# Altium PCB BEE-1012 PAY-IF V1.0.0.PcbDoc (part 6 of 7)
Units mm, origin at the board's own origin, x right, y up, seen from the top; angles counter-clockwise.
Board outline 93 x 90 mm, 6 copper layers (Top_1, GND_2, SIGNAL_3, PWR_4, GND_5, Bottom_6), stack 1.606 mm thick; 497 components, 371 nets, 2212 pads, 1215 vias.
Unrouted connection lines stored in the file: 56.
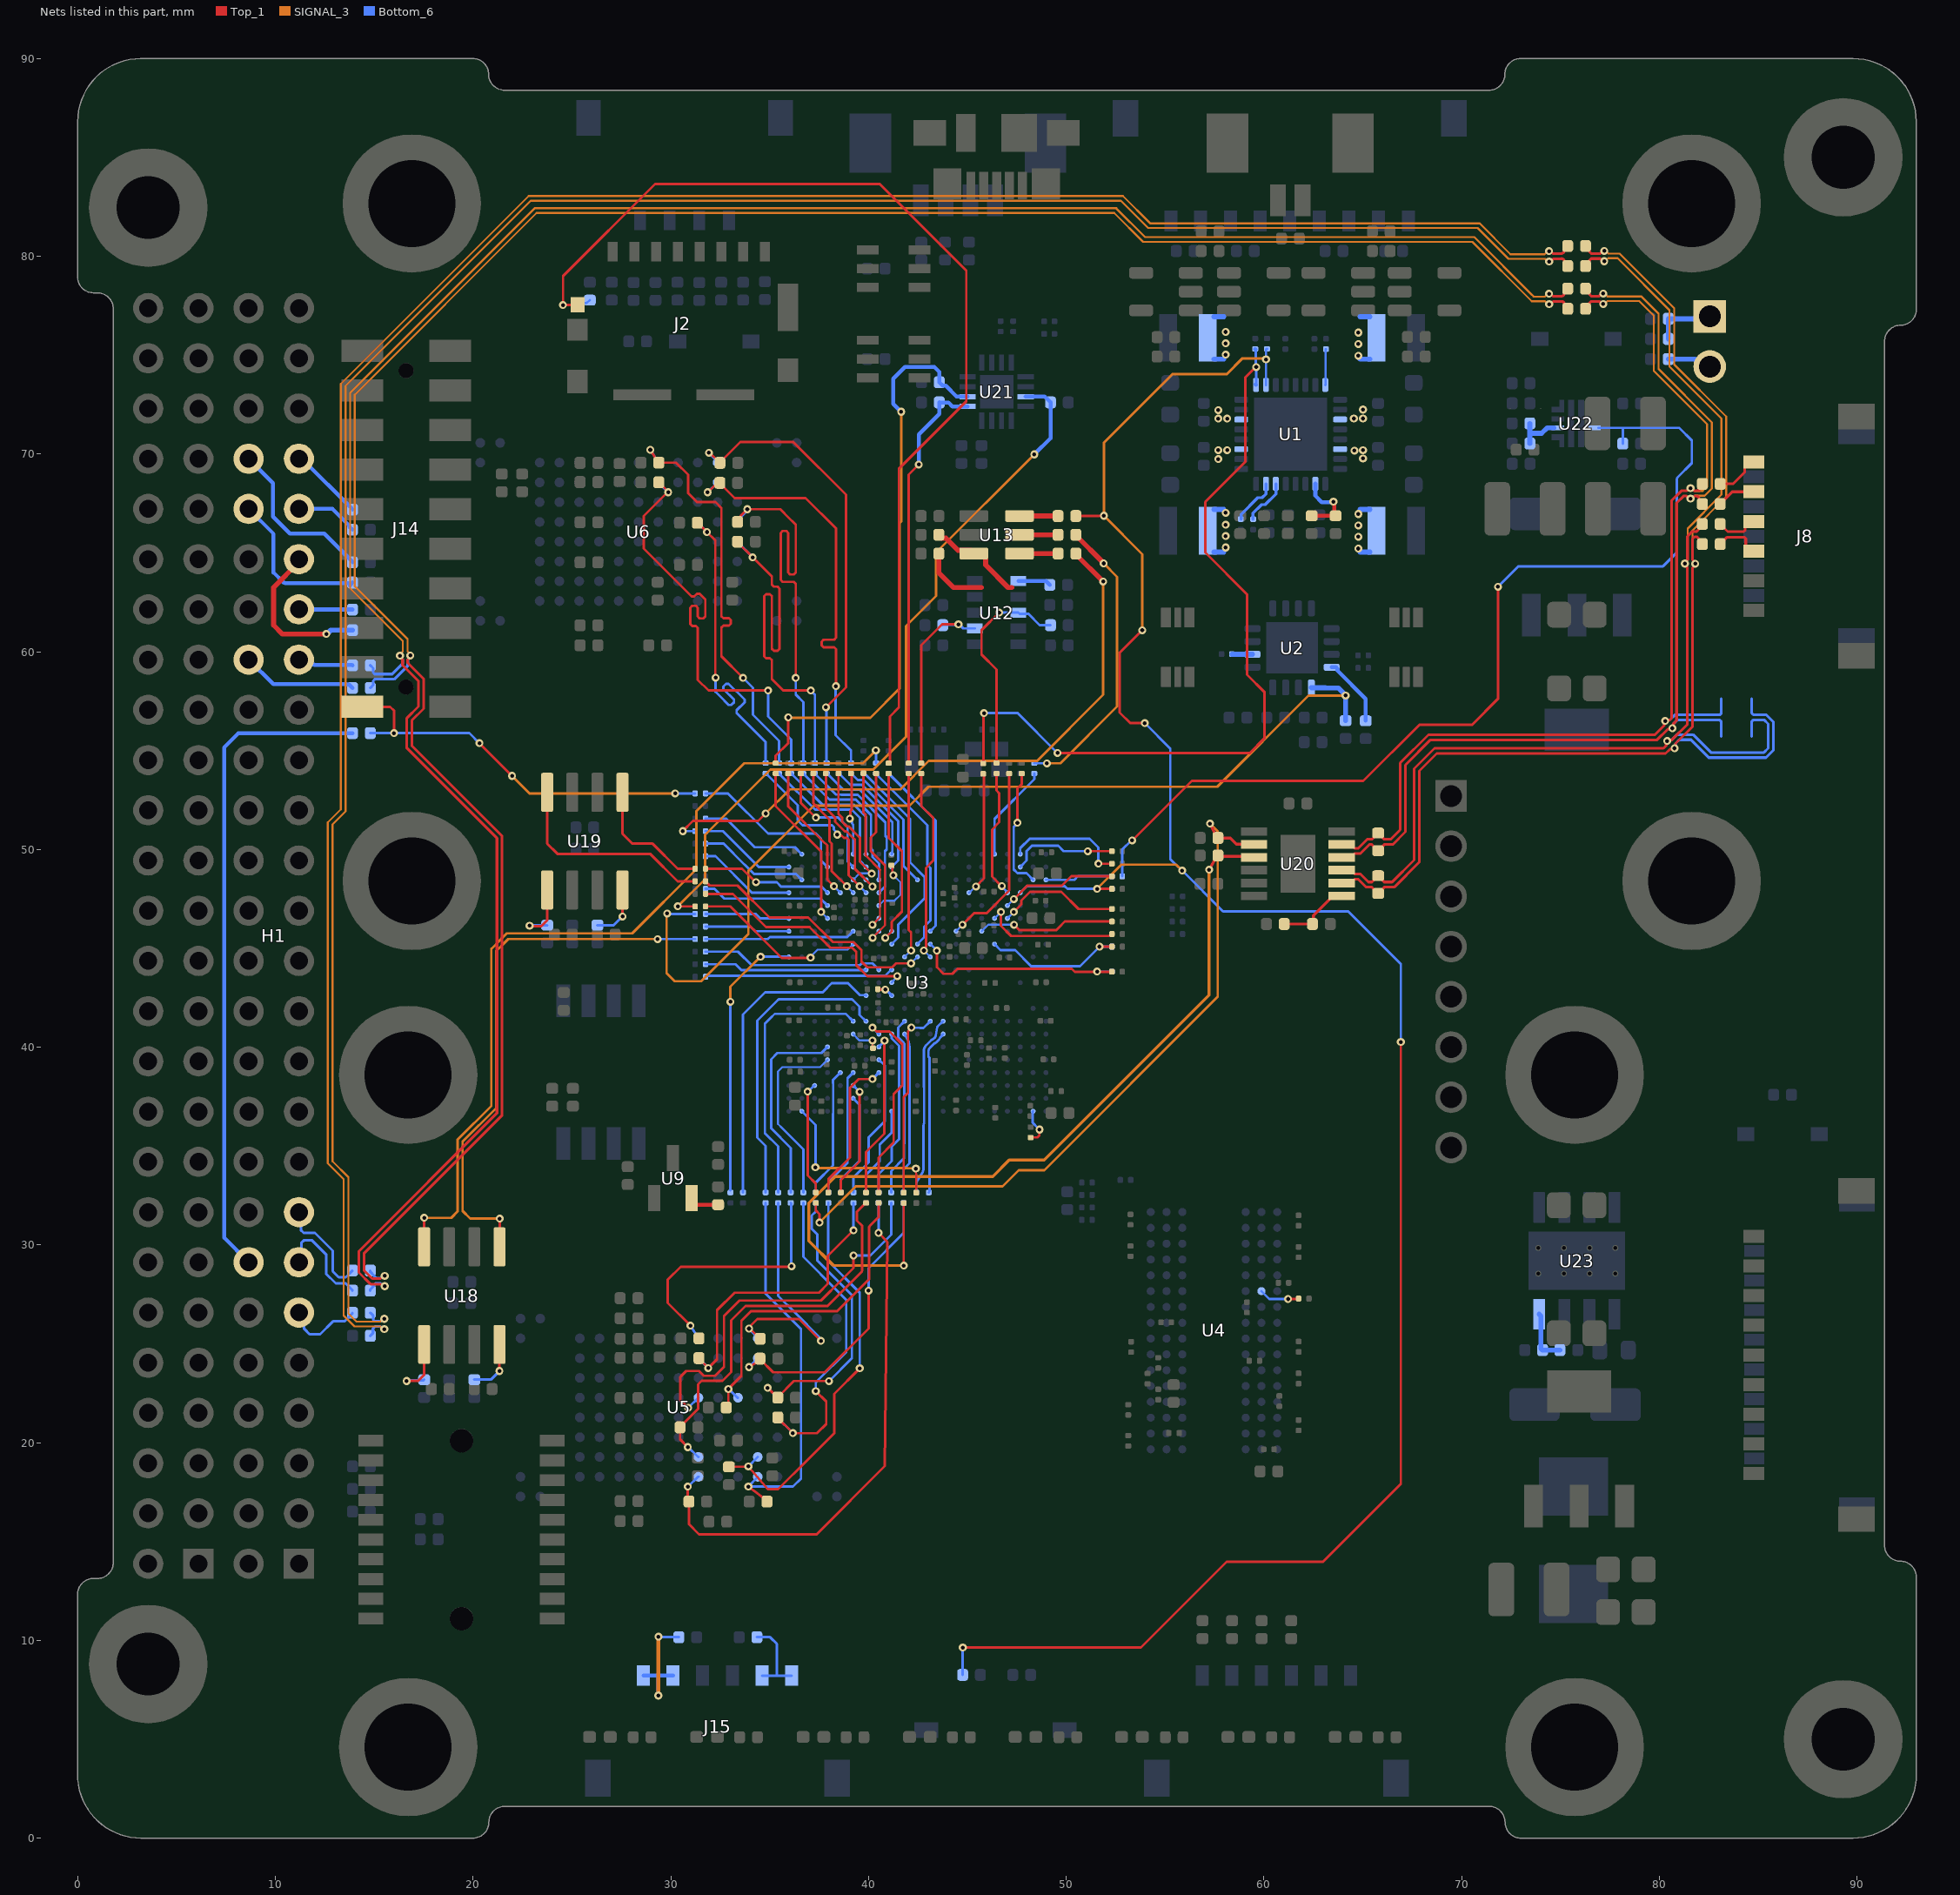
[diagram p9: the nets of this part, all layers, seen from the top]

## Via types
v1: diameter 0.4, hole 0.2, Top_1 to Bottom_6, tented both sides, 1215 vias

## Nets (pads, with @x,y where several pads share a name; then routed paths per layer and width w, separated by ;. In a path a pad name is that pad's centre, name@x,y a point inside that pad or via, vN(x,y) a via of type N, cw(c..) or ccw(c..) an arc to the next point about the centre after c; other vN are vias at no path point) (continued)
NetH1_11: H1.11 R217.2 | length 4
  Bottom_6 w0.134: H1.11@11.19,26.58 11.458,26.313 11.458,25.753 11.733,25.478 12.262,25.478 12.918,26.134 13.495,26.134 13.901,26.54 R217.2@13.901,26.565
NetH1_13: H1.13 R218.2 | length 5.3
  Bottom_6 w0.134: H1.13@11.19,29.12 11.313,29.243 11.313,30.099 11.44,30.226 11.862,30.226 12.566,29.522 12.566,28.54 13.054,28.052 13.555,28.052 13.901,27.706 R218.2@13.901,27.686
NetH1_14: H1.14 R227.1 | length 33.3
  Bottom_6 w0.2: H1.14@8.65,29.12 7.407,30.363 7.407,55.159 8.128,55.88 R227.1@13.901,55.88
NetH1_15: H1.15 R219.2 | length 5.3
  Bottom_6 w0.134: H1.15@11.19,31.66 11.292,31.558 11.292,30.745 11.433,30.604 11.999,30.604 12.9,29.703 12.9,28.664 13.202,28.363 13.564,28.363 13.901,28.7 R219.2@13.901,28.702
NetH1_37: H1.37 R224.2 | length 2.8
  Bottom_6 w0.2: H1.37@11.19,59.6 11.444,59.346 11.963,59.346 11.972,59.336 13.874,59.336 R224.2@13.901,59.309
NetH1_38: H1.38 R225.1 | length 5.8
  Bottom_6 w0.2: H1.38@8.65,59.6 9.896,58.354 13.609,58.354 13.62,58.343 13.729,58.343 13.901,58.171 R225.1@13.901,58.166
NetH1_39: H1.39 R226.2 | length 2.7
  Bottom_6 w0.2: H1.39@11.19,62.14 11.194,62.136 13.897,62.136 R226.2@13.901,62.131
NetH1_41: H1.41 R94.2 | length 8.1
  Top_1 w0.254: H1.41@11.19,64.68 11.19,64.53 9.906,63.246 9.906,61.341 10.35,60.897 v1(12.579,60.897)
  Bottom_6 w0.254: v1(12.579,60.897) 12.618,60.897 12.809,61.087 R94.2@13.901,61.087
NetH1_43: H1.43 R228.2 | length 3.2
  Bottom_6 w0.2: H1.43@11.19,67.22 12.899,67.22 13.759,66.361 13.759,66.309 R228.2@13.901,66.167
NetH1_44: H1.44 R229.1 | length 8.2
  Bottom_6 w0.2: H1.44@8.65,67.22 9.909,65.961 9.909,64.003 10.382,63.531 ccw(c10.522,63.673) 10.496,63.474 13.764,63.474 R229.1@13.901,63.5 R229.1@13.764,63.338
NetH1_45: H1.45 R230.2 | length 3.8
  Bottom_6 w0.2: H1.45@11.19,69.76 11.342,69.76 13.901,67.201 R230.2@13.901,67.183
NetH1_46: H1.46 R231.1 | length 8.4
  Bottom_6 w0.2: H1.46@8.65,69.76 9.878,68.532 9.878,66.83 10.738,65.97 12.472,65.97 13.901,64.541 R231.1@13.901,64.516
NetJ8_3: J8.3 R53.2 | length 2.4
  Top_1 w0.134: R53.2@83.079,65.44 83.433,65.795 84.296,65.795 84.375,65.716 84.375,65.324 84.613,65.087 J8.3@84.783,65.087
NetJ8_4: J8.4 R75.2 | length 2.2
  Top_1 w0.134: R75.2@83.079,66.456 83.465,66.071 84.267,66.071 84.349,66.153 84.349,66.324 84.613,66.587 J8.4@84.783,66.587
NetJ8_5: J8.5 R77.2 | length 2
  Top_1 w0.134: R77.2@83.079,67.474 83.692,68.087 J8.5@84.783,68.087
NetJ8_6: J8.6 R109.2 | length 2.3
  Top_1 w0.134: R109.2@83.079,68.488 83.728,68.488 84.329,69.089 84.329,69.324 84.592,69.587 J8.6@84.783,69.587
NetJ14_19: J14.19 R81.2 R227.2 | length 20.5
  Top_1 w0.125: J14.19@14.393,57.21 15.815,57.21 16.002,57.023 v1(16.002,55.88) ; v1(20.32,55.372) v1(21.971,53.721)
  SIGNAL_3 w0.125: v1(21.971,53.721) 22.86,52.832 v1(30.226,52.832)
  Bottom_6 w0.125: R227.2@14.801,55.88 v1(16.002,55.88) 19.812,55.88 v1(20.32,55.372) ; v1(30.226,52.832) R81.2@31.234,52.832
NetJP3_1: JP3.1 R206.1 R208.1 | length 3.2
  Bottom_6 w0.254: R206.1@80.46,75.819 R208.1@80.46,76.835 82.427,76.835 JP3.1@82.554,76.962
NetJP3_2: JP3.2 R49.1 | length 2.2
  Bottom_6 w0.254: R49.1@80.46,74.794 81.805,74.794 82.176,74.422 JP3.2@82.554,74.422
NetL1_1: L1.1 U1.11 | length 1
  Bottom_6 w0.254: v1@64.873,74.795 L1.1@65.367,74.795 ; 64.873,76.941 L1.1@65.367,76.941
  other v1: 64.551,71.794 65.016,71.794 65.016,72.243 64.781,74.965 64.781,75.565 64.781,76.14
NetL2_1: L2.1 U1.14 | length 1
  Bottom_6 w0.254: v1@64.873,65.045 L2.1@65.367,65.045 ; 64.873,67.191 L2.1@65.367,67.191
  other v1: 64.781,65.215 64.781,65.815 64.781,66.39 64.781,66.965 65.016,69.772 64.58,70.173 65.016,70.196
NetL3_1: L3.1 U1.27 | length 1
  Bottom_6 w0.254: L3.1@57.479,65.045 57.972,65.045 ; L3.1@57.479,67.191 v1@57.972,67.191
  other v1: 58.065,65.272 58.065,65.847 58.065,66.422 58.065,67.022 57.696,69.743 57.696,70.193 58.146,70.193
NetL4_1: L4.1 U1.30 | length 1
  Bottom_6 w0.254: L4.1@57.479,74.795 57.972,74.795 ; L4.1@57.479,76.941 57.972,76.941
  other v1: 57.696,71.79 58.146,71.79 57.696,72.215 58.065,75.022 58.065,75.597 58.065,76.172
NetR1_2: R1.2 U1.22 | length 2.4
  Bottom_6 w0.15: R1.2@59.456,66.7 59.456,67.01 59.883,67.437 60.071,67.437 60.606,67.972 U1.22@60.606,68.493
NetR2_2: R2.2 U1.23 | length 2.4
  Bottom_6 w0.15: R2.2@58.842,66.703 58.848,66.71 58.848,66.95 59.688,67.789 59.915,67.789 60.106,67.98 U1.23@60.106,68.493
NetR3_2: R3.2 U1.8 | length 1.8
  Bottom_6 w0.127: U1.8@63.106,73.493 63.123,73.511 63.123,75.285 R3.2@63.141,75.303
NetR8_1: R8.1 R78.2 U1.1 | length 40.9
  Top_1 w0.127: R78.2@45.803,54.351 45.825,54.373 45.825,56.874 v1(45.847,56.896) ; v1(49.562,54.878) 59.284,54.878 60.039,55.633 60.039,57.944 59.153,58.83 59.153,62.894 57.035,65.012 57.035,67.578 59.055,69.597 59.055,73.867 59.583,74.395 v1(59.612,74.395)
  Bottom_6 w0.127: v1(45.847,56.896) 47.544,56.896 v1(49.562,54.878) ; U1.1@59.584,73.515 59.606,73.536 59.609,73.54 59.609,74.392 v1(59.612,74.395) 59.587,74.419 59.587,75.287 R8.1@59.584,75.29
  Bottom_6 w0.2: R8.1@59.563,75.311 R8.1@59.584,75.29 ; U1.1@59.584,73.515 U1.1@59.606,73.493
NetR9_1: R9.1 U2.16 | length 3.6
  Bottom_6 w0.2: U2.16@63.427,59.217 63.652,59.217 63.727,59.142 63.727,59.042 65.151,57.618 R9.1@65.151,56.505
NetR10_1: R10.1 R74.2 U2.1 | length 50
  SIGNAL_3 w0.125: v1(29.817,46.765) 29.788,46.735 29.788,43.745 30.199,43.334 31.531,43.334 33.924,45.726 33.924,48.91 37.23,52.216 42.081,52.216 43.034,53.169 57.64,53.169 62.257,57.785 v1(64.135,57.785)
  Bottom_6 w0.125: v1(29.817,46.765) 29.846,46.736 R74.2@31.234,46.736
  Bottom_6 w0.25: U2.1@62.402,58.192 62.414,58.179 63.106,58.179 63.119,58.166 63.769,58.166 64.135,57.8 v1(64.135,57.785) R10.1@64.135,56.515
NetR11_1: R11.1 U2.6 | length 1
  Bottom_6 w0.254: R11.1@58.393,59.867 U2.6@59.427,59.867
NetR12_1: R12.1 R13.2 U1.18 | length 3.6
  Top_1 w0.2: R13.2@62.42,66.871 62.583,66.871 63.464,66.871 R12.1@63.627,66.871 63.608,67.008 63.592,67.008 63.557,67.043 63.557,67.547 v1(63.519,67.585)
  Bottom_6 w0.2: U1.18@62.606,68.493 62.606,67.881 62.925,67.562 63.495,67.562 v1(63.519,67.585)
NetR21_1: R21.1 R22.2 U3.H10 | length 11.2
  Top_1 w0.125: v1(43.463,44.878) 43.463,44.042 43.797,43.708 44.247,43.708 44.504,43.965 49.628,43.965 50.289,43.965 50.439,43.815 51.562,43.815 R22.2@52.316,43.815
  Bottom_6 w0.125: U3.H10@43.128,45.212 v1(43.463,44.878) ; v1(51.562,43.824) 51.567,43.82 52.311,43.82 R21.1@52.316,43.815
NetR67_2: R67.2 R169.2 | length 32.5
  Top_1 w0.125: v1(30.607,50.927) 31.119,51.439 34.421,51.439 v1(34.798,51.816)
  Top_1 w0.254: R169.2@50.488,64.963 50.488,64.932 51.871,63.549 v1(51.871,63.547)
  SIGNAL_3 w0.125: v1(34.798,51.816) 36.022,53.04 41.61,53.04 43.053,54.483 48.538,54.483 51.871,57.816 v1(51.871,63.547)
  Bottom_6 w0.125: v1(30.607,50.927) R67.2@31.234,50.927
NetR87_2: R87.2 U18.1 | length 27.6
  Top_1 w0.125: U18.1@21.336,29.902 21.347,29.913 v1(21.347,31.33)
  SIGNAL_3 w0.125: v1(21.347,31.33) 19.858,31.33 19.471,31.716 19.471,35.221 21.177,36.926 21.177,44.86 21.783,45.466 v1(29.337,45.466)
  Bottom_6 w0.125: v1(29.337,45.466) R87.2@31.234,45.466
NetR88_2: R88.2 R207.1 U22.9 | length 50.7
  Top_1 w0.127: v1(53.339,50.455) 56.35,53.467 65.03,53.467 67.873,56.31 70.534,56.31 71.838,57.614 v1(71.838,63.281)
  Bottom_6 w0.127: R88.2@52.84,48.641 52.84,49.997 53.299,50.455 v1(53.339,50.455) ; v1(71.838,63.281) 72.865,64.308 80.132,64.308 ccw(c80.132,64.435) 80.221,64.344 80.859,64.982 ccw(c80.768,65.071) 80.895,65.071 80.895,68.735 cw(c81.022,68.735) 80.933,68.825 81.646,69.538 81.646,70.683 81.021,71.307 ; U22.9@76.917,71.32 78.171,71.32 ; R207.1@78.154,70.521 78.154,71.304 78.171,71.32 ; 81.008,71.32 78.171,71.32
NetR89_2: R89.2 U18.4 | length 43.3
  Top_1 w0.125: U18.4@17.526,29.902 v1(17.526,31.369)
  SIGNAL_3 w0.125: v1(17.526,31.369) 18.896,31.369 19.221,31.694 19.221,35.324 20.927,37.03 20.927,44.971 21.711,45.755 28.051,45.755 31.3,49.004 31.3,51.939 33.72,54.359 39.718,54.359 v1(40.373,55.013)
  Bottom_6 w0.125: v1(40.373,55.013) 40.386,55 R89.2@40.386,54.364
NetR91_2: R91.2 U19.1 | length 6.5
  Top_1 w0.134: U19.1@27.559,52.889 27.559,50.8 28.067,50.292 29.083,50.292 30.353,49.022 R91.2@31.234,49.022
NetR93_2: R93.2 U19.4 | length 10.9
  Top_1 w0.134: U19.4@23.749,52.889 23.749,50.292 24.264,49.777 28.957,49.777 30.347,48.387 R93.2@31.234,48.387
NetR96_2: R96.2 R164.2 U12.3 | length 11.2
  Top_1 w0.127: R96.2@46.482,54.364 46.482,59.093 45.72,59.855 45.72,61.087 v1(46.609,61.976)
  Bottom_6 w0.125: v1(46.609,61.976) U12.3@47.582,61.976 47.65,61.908 48.096,61.908 48.663,61.341 R164.2@49.207,61.341
NetR98_2: R98.2 R197.1 U21.15 | length 38.6
  Top_1 w0.125: v1(30.353,47.124) 30.36,47.117 R98.2@31.234,47.117
  SIGNAL_3 w0.125: v1(30.353,47.124) 30.36,47.124 31.73,48.494 31.73,50.735 35.034,54.038 40.243,54.038 41.901,55.696 41.901,61.294 43.42,62.813 43.42,65.01 v1(48.387,69.977)
  Bottom_6 w0.2: U21.15@47.952,72.902 48.914,72.902 49.03,72.785 49.035,72.785 49.207,72.613 R197.1@49.207,72.608 49.207,70.797 v1(48.387,69.977)
NetR99_2: R99.2 R198.2 U21.6 | length 29.6
  Top_1 w0.125: R99.2@35.306,54.364 35.306,54.737 35.941,55.372 v1(35.941,56.68)
  SIGNAL_3 w0.125: v1(35.941,56.68) 35.966,56.655 40.091,56.655 41.586,58.15 41.586,66.509 41.656,66.579 v1(41.656,72.136)
  Bottom_6 w0.2: v1(41.656,72.136) 41.255,72.537 41.255,73.803 41.848,74.397 43.332,74.397 43.582,74.147 R198.2@43.582,73.625 43.582,73.62 43.754,73.448 43.914,73.448 44.454,72.908 45.006,72.908 U21.6@45.012,72.902
NetR100_2: R100.2 R199.2 U21.5 | length 20.4
  Top_1 w0.125: R100.2@42.037,54.364 42.037,68.961 v1(42.545,69.469)
  Bottom_6 w0.2: v1(42.545,69.469) 42.545,70.993 43.582,72.03 R199.2@43.582,72.609 43.586,72.605 44.04,72.605 44.243,72.402 U21.5@45.012,72.402
NetR125_2: R125.2 R165.2 U12.7 | length 10
  Top_1 w0.125: R125.2@42.672,54.364 42.672,60.325 43.731,61.384 v1(44.552,61.384)
  Bottom_6 w0.125: R165.2@43.757,61.341 43.779,61.363 44.53,61.363 v1(44.552,61.384) 44.586,61.384 44.794,61.176 U12.7@45.382,61.176
NetR126_2: R126.2 R168.2 | length 14.9
  Top_1 w0.254: R168.2@50.488,65.913 50.488,65.892 51.898,64.482 v1(51.898,64.467)
  SIGNAL_3 w0.125: v1(49.025,54.353) 49.029,54.356 49.706,54.356 52.578,57.228 52.578,63.787 v1(51.898,64.467)
  Bottom_6 w0.125: R126.2@48.387,54.364 48.393,54.359 49.019,54.359 v1(49.025,54.353)
NetR128_1: R128.1 U3.AA2 | length 1.8
  Top_1 w0.125: R128.1@48.228,35.437 48.541,35.437 48.646,35.542 48.646,35.828 v1(48.651,35.833)
  Bottom_6 w0.125: U3.AA2@48.328,36.762 48.304,36.738 48.304,36.65 48.301,36.646 48.301,36.183 48.572,35.912 v1(48.651,35.833)
NetR131_2: R131.2 U4.L8 | length 2.1
  Top_1 w0.125: v1(61.226,27.262) 61.687,27.262 R131.2@61.756,27.283
  Bottom_6 w0.125: U4.L8@59.878,27.662 60.278,27.262 v1(61.226,27.262) v1@61.278,27.262
NetR161_1: R161.1 U9.2 | length 1.5
  Top_1 w0.2: U9.2@31.059,32.36 31.059,32.241 31.264,32.036 R161.1@32.395,32.036
NetR166_2: R166.2 U12.1 | length 1.7
  Bottom_6 w0.2: U12.1@47.582,63.576 48.976,63.576 49.168,63.383 R166.2@49.168,63.379
NetR167_1: R167.1 U13.6 | length 2
  Top_1 w0.254: U13.6@47.637,66.863 R167.1@49.588,66.863
NetR168_1: R168.1 U13.5 | length 2
  Top_1 w0.254: U13.5@47.637,65.913 R168.1@49.588,65.913
NetR169_1: R169.1 U13.4 | length 2
  Top_1 w0.254: U13.4@47.637,64.963 R169.1@49.588,64.963
NetR170_1: R170.1 SB1.1 | length 3.4
  Top_1 w0.254: R170.1@43.561,64.958 43.561,63.989 44.304,63.246 SB1.1@45.707,63.246
NetR171_1: R171.1 SB1.2 U13.3 | length 5
  Top_1 w0.254: R171.1@43.561,65.913 43.561,65.894 43.708,65.746 43.919,65.746 44.534,65.131 45.159,65.131 U13.3@45.327,64.963 45.757,64.963 45.925,64.795 45.925,64.387 47.066,63.246 SB1.2@47.244,63.246
NetR179_2: R179.2 U18.5 | length 3.5
  Top_1 w0.134: v1(16.637,23.114) 16.651,23.128 17.233,23.128 17.526,23.422 U18.5@17.526,24.962
  Bottom_6 w0.134: v1(16.637,23.114) 16.672,23.149 17.491,23.149 R179.2@17.526,23.183
NetR181_1: R181.1 U18.8 | length 2.8
  Top_1 w0.134: v1(21.336,23.622) U18.8@21.336,24.962
  Bottom_6 w0.134: R181.1@20.066,23.183 20.897,23.183 v1(21.336,23.622)
NetR185_2: R185.2 U19.5 | length 3.5
  Top_1 w0.134: v1(22.86,46.143) 22.887,46.115 23.456,46.115 23.749,46.409 U19.5@23.749,47.949
  Bottom_6 w0.134: v1(22.86,46.143) 22.874,46.156 23.735,46.156 R185.2@23.749,46.17
NetR187_1: R187.1 U19.8 | length 2.8
  Top_1 w0.134: v1(27.559,46.609) U19.8@27.559,47.949
  Bottom_6 w0.134: R187.1@26.289,46.17 27.12,46.17 v1(27.559,46.609)
NetR191_1: R191.1 R193.1 U20.7 | length 3.7
  Top_1 w0.15: R193.1@61.029,46.228 R191.1@62.459,46.228 62.502,46.271 62.502,46.665 63.487,47.65 U20.7@63.938,47.65
NetR203_2: R203.2 R204.1 U22.2 | length 2.4
  Bottom_6 w0.254: R203.2@73.454,70.53 73.454,71.045 ; R204.1@73.454,71.545 73.454,71.045 ; U22.2@74.674,71.323 74.596,71.323 74.594,71.326 74.326,71.326 74.045,71.045 73.454,71.045
NetR210_2: R210.2 R211.1 U23.4 | length 2.8
  Bottom_6 w0.254: U23.4@73.924,26.495 74.01,26.41 74.01,24.767 R210.2@74.095,24.681 R211.1@74.973,24.681
NRST: C29.1 R7.1 R18.2 R167.2 R188.2 U1.2 U3.D3 | length 114.7
  Top_1 w0.127: v1(44.773,9.636) 53.786,9.636 58.12,13.97 62.992,13.97 66.929,17.907 v1(66.929,40.259) ; R167.2@50.488,66.863 50.494,66.869 51.901,66.869 v1(51.907,66.876) ; v1(51.562,48.006) C29.1@52.316,48.006 ; v1(53.848,61.087) 52.705,59.944 52.705,56.925 53.242,56.388 v1(53.975,56.388)
  SIGNAL_3 w0.125: v1(51.562,48.006) 52.788,49.232 55.564,49.232 v1(55.867,48.929)
  SIGNAL_3 w0.127: v1(53.848,61.087) 53.848,64.935 v1(51.907,66.876) 51.907,70.576 55.362,74.031 58.11,74.031 58.917,74.838 59.756,74.838 59.759,74.835 60.057,74.835 v1(60.11,74.782)
  Bottom_6 w0.127: R188.2@44.762,8.255 44.767,8.26 44.767,9.631 v1(44.773,9.636) ; U3.D3@47.678,47.812 48,48.134 49.936,48.134 50.064,48.006 v1(51.562,48.006) R18.2@52.316,48.006 ; v1(53.975,56.388) 55.265,55.098 55.265,49.51 55.846,48.929 v1(55.867,48.929) 57.933,46.863 64.266,46.863 66.929,44.2 v1(66.929,40.259) ; U1.2@60.106,73.493 60.11,73.497 v1(60.11,74.782) 60.11,75.279 60.147,75.317 R7.1@60.16,75.317
NRST_OUT: R19.2 U3.E4 | length 5.9
  Top_1 w0.125: v1(47.353,47.487) 48.031,48.165 49.781,48.165 50.257,48.641 R19.2@52.316,48.641
  Bottom_6 w0.1: U3.E4@47.028,47.162 v1(47.353,47.487)
PA0: R31.1 U3.U18 | length 9.4
  Bottom_6 w0.1: 35.629,35.912 35.418,36.123 35.418,38.765 35.642,38.988 37.554,38.988 U3.U18@37.928,39.362
  Bottom_6 w0.125: 35.629,35.912 36.703,34.838 R31.1@36.703,32.647
PA1: R32.1 U3.V17 | length 6.6
  Bottom_6 w0.125: R32.1@37.338,32.647 37.338,33.147 38.209,34.018 38.209,35.912 38.209,36.635 38.216,36.642 38.216,37.531 38.214,37.534 38.214,37.857 38.216,37.859 38.216,38.182 38.209,38.189 38.209,38.343 U3.V17@38.578,38.712
PA2: R34.1 U3.R14 | length 10.3
  Top_1 w0.125: v1(40.203,40.987) 40.218,40.987 40.412,40.794 41.066,40.794 41.716,40.144 41.716,38.061 41.275,37.619 41.275,35.912 41.275,35.177 40.513,34.415 40.513,32.785 R34.1@40.513,32.647
  Bottom_6 w0.125: v1(40.203,40.987) U3.R14@40.528,40.662
PA3: R35.1 U3.T18 | length 10.3
  Bottom_6 w0.125: R35.1@36.068,32.647 36.068,34.904 35.075,35.897 35.075,39.391 35.391,39.707 37.623,39.707 U3.T18@37.928,40.012
PA4: R37.1 U3.P16 | length 13.6
  Bottom_6 w0.1: 35.128,41.552 35.26,41.683 38.857,41.683 38.87,41.67
  Bottom_6 w0.125: 35.128,41.552 34.761,41.185 34.761,35.653 35.433,34.981 R37.1@35.433,32.647 ; 38.87,41.67 U3.P16@39.228,41.312
PA5: R38.1 U3.V16 | length 6.6
  Bottom_6 w0.125: R38.1@37.973,32.647 37.973,33.184 38.944,34.155 38.944,35.912 38.944,36.638 38.939,36.642 38.939,37.531 38.942,37.534 38.942,37.857 38.939,37.859 38.939,38.182 38.944,38.186 38.944,38.428 U3.V16@39.228,38.712
PA6: R39.1 U3.T14 | length 8.5
  Top_1 w0.125: R39.1@39.878,32.647 39.878,34.701 40.802,35.625 40.802,35.912 40.802,40.321 v1(40.813,40.333)
  Bottom_6 w0.125: U3.T14@40.528,40.012 40.528,40.03 40.813,40.315 v1(40.813,40.333)
PA7: R41.1 U3.P15 | length 15.5
  Bottom_6 w0.125: R41.1@34.798,32.647 34.798,35.014 34.38,35.433 34.38,41.345 35.328,42.294 35.418,42.384 cw(c35.507,42.296) 35.507,42.421 39.126,42.421 cw(c39.126,42.296) 39.214,42.384 39.553,42.045 39.553,41.637 U3.P15@39.878,41.312
PA8: R44.1 U3.R13 | length 8.6
  Bottom_6 w0.125: R44.1@40.513,32.647 40.513,33.579 41.175,34.241 41.175,34.97 41.551,35.346 41.551,35.912 41.551,40.064 41.178,40.437 U3.R13@41.178,40.662
PA9: R46.1 U3.U14 | length 7.5
  Bottom_6 w0.125: R46.1@39.243,32.647 39.243,33.413 40.005,34.175 40.005,35.438 40.479,35.912 40.818,36.25 40.818,39.072 U3.U14@40.528,39.362
PA10: R48.1 U3.R12 | length 8.2
  Bottom_6 w0.125: R48.1@41.783,32.647 41.783,33.823 42.08,34.12 42.08,35.912 42.08,39.989 42.079,39.997 42.042,40.275 U3.R12@41.828,40.662
PA11: R50.1 U3.P12 | length 9.2
  Bottom_6 w0.125: R50.1@41.148,32.647 41.148,33.733 41.803,34.388 41.816,35.808 41.816,40.181 41.779,40.218 41.503,40.494 41.503,40.987 U3.P12@41.828,41.312
PA14: R55.1 U3.V14 | length 7.5
  Top_1 w0.125: R55.1@37.973,32.647 37.973,33.325 39.065,34.417 39.065,37.944 39.508,38.387 v1(40.203,38.387)
  Bottom_6 w0.125: v1(40.203,38.387) U3.V14@40.528,38.712
PA17: R56.1 U3.R9 | length 8.3
  Bottom_6 w0.125: R56.1@43.053,32.647 43.083,32.716 43.083,35.912 43.083,39.466 43.032,39.517 43.032,39.818 43.083,39.938 43.12,39.975 43.321,40.176 cw(c43.409,40.087) 43.351,40.198 43.366,40.206 ccw(c43.128,40.662) 43.546,40.362 43.645,40.5 cw(c43.746,40.427) 43.65,40.506 U3.R9@43.778,40.662
PA18: R58.1 U3.W16 | length 5.9
  Top_1 w0.125: R58.1@38.608,32.647 38.608,33.265 39.553,34.21 v1(39.553,37.737)
  Bottom_6 w0.125: U3.W16@39.228,38.062 v1(39.553,37.737)
PA21: R59.1 U3.W19 | length 5.8
  Top_1 w0.125: v1(36.923,37.755) 36.927,37.75 36.927,33.518 37.338,33.107 R59.1@37.338,32.647
  Bottom_6 w0.125: v1(36.923,37.755) 36.947,37.755 37.254,38.062 U3.W19@37.278,38.062
PA22: R61.1 U3.P10 | length 9.6
  Top_1 w0.125: R61.1@41.783,32.639 41.783,37.465 42.004,37.686 42.004,40.786 v1(42.17,40.992)
  Bottom_6 w0.125: v1(42.17,40.992) 42.614,40.972 ccw(c42.62,41.097) 42.62,40.972 42.788,40.972 U3.P10@43.128,41.312
PA23: R63.1 U3.AA20 | length 9.4
  Top_1 w0.125: v1(42.395,33.856) 42.42,33.413 cw(c42.295,33.406) 42.42,33.406 42.42,32.641 R63.1@42.418,32.639
  SIGNAL_3 w0.125: v1(37.315,33.924) 37.349,33.89 41.945,33.89 cw(c41.945,33.765) 41.954,33.89 v1(42.395,33.856)
  Bottom_6 w0.125: U3.AA20@36.628,36.762 37.32,36.07 37.32,35.912 37.32,33.929 v1(37.315,33.924)
PA24: R65.1 U3.P9 | length 9.1
  Bottom_6 w0.125: R65.1@42.418,32.647 42.418,33.137 cw(c42.543,33.137) 42.438,33.204 42.721,33.646 ccw(c42.395,33.856) 42.782,33.856 42.782,35.912 42.784,36.018 42.814,36.196 42.814,36.462 42.806,39.423 42.806,39.838 cw(c43.157,39.835) 42.908,40.083 43.162,40.337 cw(c43.41,40.088) 43.256,40.403 ccw(c43.128,40.662) 43.412,40.613 43.478,40.988 cw(c43.601,40.967) 43.512,41.055 U3.P9@43.769,41.312
PA25: R67.1 U3.B21 | length 5
  Bottom_6 w0.125: R67.1@31.758,50.927 32.638,50.927 34.455,49.11 35.328,49.11 U3.B21@35.976,49.11
PA26: R69.1 U3.K14 | length 9.2
  Bottom_6 w0.125: R69.1@31.758,44.831 33.401,44.831 34.086,44.146 39.562,44.146 39.653,44.237 40.203,44.237 U3.K14@40.528,43.912
PA28: R72.1 U3.L13 | length 12.2
  Top_1 w0.125: R72.1@31.758,47.752 33.14,47.752 34.819,46.073 37.025,46.073 38.07,45.027 39.174,45.027 39.385,44.816 39.385,44.149 39.944,43.59 v1(41.456,43.59)
  Bottom_6 w0.1: U3.L13@41.178,43.262 v1(41.456,43.59)
PA29: R92.1 U3.D21 | length 5
  Bottom_6 w0.125: R92.1@31.758,49.657 32.258,49.657 34.103,47.812 U3.D21@35.978,47.812
PA30: R73.1 U3.K15 | length 8.3
  Bottom_6 w0.125: R73.1@31.758,44.196 33.274,44.196 33.575,43.895 39.861,43.895 U3.K15@39.878,43.912
PA31: R74.1 U3.F21 | length 4.3
  Bottom_6 w0.125: R74.1@31.758,46.736 34.304,46.736 34.528,46.512 U3.F21@35.978,46.512
PB1: R33.1 U3.G21 | length 4.3
  Bottom_6 w0.125: R33.1@31.758,46.101 34.031,46.101 34.27,45.862 U3.G21@35.978,45.862
PB3: R113.1 U3.J21 | length 13.9
  SIGNAL_3 w0.125: v1(33.02,42.291) 33.02,43.053 v1(34.544,44.577)
  Bottom_6 w0.125: R113.1@33.02,32.766 v1(33.02,42.291) ; v1(34.544,44.577) 35.328,44.577 35.963,44.577 U3.J21@35.978,44.562
PB6: R40.1 U3.K13 | length 9.6
  Bottom_6 w0.125: R40.1@31.758,43.561 31.805,43.608 35.328,43.608 40.85,43.608 41.154,43.912 U3.K13@41.178,43.912
PB7: R42.1 U3.C20 | length 5.6
  Bottom_6 w0.125: R42.1@31.758,50.292 32.673,50.292 33.158,49.807 33.216,49.749 34.213,48.752 35.328,48.752 36.338,48.752 U3.C20@36.628,48.462
PB15: R111.1 U3.M15 | length 16.1
  Bottom_6 w0.125: R111.1@33.655,32.647 33.655,41.656 34.78,42.781 37.686,42.781 38.147,43.242 38.962,43.242 39.574,42.631 39.859,42.631 U3.M15@39.878,42.612
PB21: R60.1 U3.D15 | length 9.2
  Top_1 w0.127: v1(38.417,50.751) 38.469,50.699 38.649,50.699 38.757,50.591 38.899,50.591 39,50.49 39,48.69 v1(39.553,48.137)
  Bottom_6 w0.1: v1(39.553,48.137) U3.D15@39.878,47.812
  Bottom_6 w0.125: R60.1@34.798,53.84 34.811,53.84 36.416,52.234 36.416,51.468 36.662,51.222 38.156,51.222 38.245,51.134 38.245,50.997 38.417,50.825 v1(38.417,50.751)
PB22: R62.1 U3.C14 | length 7.8
  Bottom_6 w0.125: R62.1@36.703,53.84 36.712,53.84 36.787,53.765 36.787,53.756 38.028,52.515 39.149,52.515 39.358,52.514 40.132,51.74 40.132,50.043 40.212,49.963 40.212,49.61 40.541,49.281 40.541,48.475 U3.C14@40.528,48.462
PB23: R64.1 U3.D14 | length 8.3
  Bottom_6 w0.125: R64.1@37.293,53.84 37.302,53.84 37.377,53.765 37.377,53.756 38.362,52.771 38.621,52.771 38.627,52.765 39.253,52.765 39.461,52.764 40.858,51.368 40.858,50.682 40.924,50.616 40.924,50.612 40.924,49.999 40.836,49.91 40.836,48.12 U3.D14@40.528,47.812
PB24: R66.1 U3.B15 | length 7.6
  Bottom_6 w0.125: R66.1@35.474,53.843 35.483,53.843 35.557,53.768 35.557,53.759 37.302,52.015 38.942,52.015 39.151,52.014 39.563,51.603 39.563,50.412 39.563,49.427 U3.B15@39.878,49.112
PB25: R68.1 U3.A13 | length 6
  Bottom_6 w0.125: R68.1@37.893,53.84 37.906,53.84 38.73,53.015 39.356,53.015 39.565,53.014 41.205,51.374 41.205,50.612 41.205,49.878 41.202,49.874 41.202,49.786 U3.A13@41.178,49.762
PB26: R70.1 U3.A15 | length 6.6
  Bottom_6 w0.125: R70.1@36.093,53.838 36.102,53.838 36.176,53.763 36.176,53.754 37.666,52.265 39.046,52.265 39.254,52.264 39.878,51.641 39.878,50.612 U3.A15@39.878,49.762
PB27: R71.1 U3.C11 | length 7
  Bottom_6 w0.125: R71.1@39.116,53.848 39.128,53.848 39.462,53.515 39.563,53.515 ; 39.564,53.514 39.772,53.514 41.772,51.514 41.772,50.612 41.772,49.168 U3.C11@42.478,48.462
PC2: R78.1 U3.D7 | length 6.4
  Top_1 w0.125: v1(45.435,48.128) 45.842,48.535 45.842,50.412 45.842,53.787 R78.1@45.803,53.826
  Bottom_6 w0.1: U3.D7@45.078,47.812 45.099,47.812 45.414,48.128 v1(45.435,48.128)
PC3: R80.1 U3.G8 | length 9.5
  Top_1 w0.125: v1(44.753,46.187) 45.348,46.782 45.984,46.782 47.117,47.915 47.117,50.412 R80.1@47.117,53.84
  Bottom_6 w0.1: U3.G8@44.428,45.862 v1(44.753,46.187)
PC4: R82.1 U3.C2 | length 6.2
  Top_1 w0.125: v1(47.533,51.346) 47.533,53.086 47.752,53.304 R82.1@47.752,53.84
  Bottom_6 w0.125: v1(47.533,51.346) 47.533,51.325 47.345,51.138 47.345,48.986 47.532,48.799 47.991,48.799 U3.C2@48.328,48.462
PC11: R88.1 U3.C1 | length 3.4
  Bottom_6 w0.125: U3.C1@48.978,48.462 50.41,48.462 50.589,48.641 R88.1@52.316,48.641
PC12: C139.2 R90.1 U3.H5 | length 7.4
  Top_1 w0.125: v1(51.689,45.085) C139.2@52.316,45.085
  Bottom_6 w0.125: U3.H5@46.378,45.212 46.678,44.912 47.417,44.912 48.23,44.099 50.703,44.099 v1(51.689,45.085) R90.1@52.316,45.085
PC17: R96.1 U3.D4 | length 6.6
  Top_1 w0.125: R96.1@46.482,53.84 46.482,52.977 46.617,52.841 46.617,51.371 46.253,51.007 46.253,48.627 46.734,48.145 v1(46.743,48.145)
  Bottom_6 w0.1: v1(46.743,48.145) 46.743,48.121 47.028,47.836 U3.D4@47.028,47.812
PC22: R101.1 U3.F4 | length 6.3
  Top_1 w0.125: v1(47.353,46.837) 47.731,47.215 47.731,47.415 48.17,47.854 49.762,47.854 50.626,46.99 R101.1@52.316,46.99
  Bottom_6 w0.1: U3.F4@47.028,46.512 v1(47.353,46.837)
PC23: R102.1 U3.A3 | length 6.1
  Top_1 w0.125: v1(51.634,49.279) 51.635,49.277 52.304,49.277 R102.1@52.309,49.282
  Bottom_6 w0.125: U3.A3@47.678,49.762 47.678,50.065 48.159,50.546 51.181,50.546 51.634,50.093 v1(51.634,49.279)
PC24: R103.1 U3.F5 | length 7
  Top_1 w0.125: v1(46.703,46.837) 46.703,46.139 47.218,45.625 49.628,45.625 52.167,45.625 52.179,45.636 52.241,45.636 52.316,45.711 R103.1@52.316,45.72
  Bottom_6 w0.1: U3.F5@46.378,46.512 v1(46.703,46.837)
PC25: R104.1 U3.B3 | length 5.5
  Top_1 w0.125: v1(51.092,49.911) R104.1@52.316,49.911
  Bottom_6 w0.125: U3.B3@47.678,49.112 48.003,49.437 48.003,49.915 48.271,50.184 49.597,50.184 49.869,49.911 v1(51.092,49.911)
PC26: R105.1 U3.G6 | length 7
  Top_1 w0.125: v1(47.361,46.193) 47.636,45.918 49.503,45.918 49.628,46.043 49.94,46.355 R105.1@52.315,46.355
  Bottom_6 w0.1: U3.G6@45.728,45.862 46.059,46.193 v1(47.361,46.193)
PC27: R106.1 U3.C15 | length 7.2
  Top_1 w0.125: R106.1@37.846,53.84 37.846,52.081 38.322,51.605 38.322,51.394 38.798,50.918 38.893,50.918 39.199,50.612 39.314,50.497 39.314,49.008 v1(40.202,48.12)
  Bottom_6 w0.1: U3.C15@39.878,48.462 39.878,48.453 40.202,48.129 v1(40.202,48.12)
PC28: R107.1 U3.D16 | length 6.9
  Top_1 w0.125: R107.1@37.211,53.84 37.211,52.332 38.029,51.514 38.029,50.612 38.029,50.408 38.138,50.299 38.138,48.902 v1(38.903,48.137)
  Bottom_6 w0.1: v1(38.903,48.137) U3.D16@39.228,47.812
PC29: R108.1 U3.B16 | length 6.5
  Top_1 w0.125: R108.1@36.576,53.84 36.576,52.357 37.319,51.614 v1(37.34,51.614)
  Bottom_6 w0.125: v1(37.34,51.614) 38.455,51.614 38.939,51.13 38.939,50.412 38.939,49.401 U3.B16@39.228,49.112
PC30: R110.1 U3.D17 | length 7.1
  Top_1 w0.125: R110.1@35.941,53.84 35.941,52.177 37.706,50.412 37.912,50.205 37.912,48.478 v1(38.253,48.137)
  Bottom_6 w0.1: v1(38.253,48.137) U3.D17@38.578,47.812
PC31: R112.1 U3.A16 | length 4.2
  Top_1 w0.125: v1(39.062,51.555) 39.085,51.579 39.085,51.943 39.148,52.005 39.148,53.808 R112.1@39.116,53.84
  Bottom_6 w0.125: v1(39.062,51.555) 39.062,51.481 39.168,51.375 39.168,51.307 39.228,51.247 39.228,50.412 U3.A16@39.228,49.762
PD0: R76.1 U3.C16 | length 6.9
  Top_1 w0.125: R76.1@38.481,53.84 38.481,51.799 38.674,51.606 38.674,51.395 38.901,51.168 38.997,51.168 39.553,50.612 39.564,50.6 39.564,49.375 40.162,48.777 v1(40.164,48.777)
  Bottom_6 w0.1: U3.C16@39.228,48.462 39.553,48.787 40.155,48.787 v1(40.164,48.777)
PD2: R79.1 U3.G13 | length 9.4
  Top_1 w0.125: v1(40.851,45.533) 41.176,45.858 41.176,46.338 41.692,46.854 41.692,49.91 41.021,50.581 R79.1@41.021,53.84
  Bottom_6 w0.1: v1@40.851,45.534 U3.G13@41.178,45.862
PD3: R81.1 U3.B18 | length 8.4
  Bottom_6 w0.125: R81.1@31.758,52.832 32.893,52.832 34.924,50.801 37.339,50.801 37.603,50.537 37.603,49.437 U3.B18@37.928,49.112
PD6: R83.1 U3.G10 | length 9.1
  Bottom_6 w0.125: R83.1@41.021,53.84 41.023,53.84 41.121,53.742 41.121,53.74 43.403,51.457 43.403,50.612 43.403,46.143 43.128,45.868 U3.G10@43.128,45.862
PD7: R84.1 U3.A20 | length 5.6
  Bottom_6 w0.125: R84.1@31.758,51.562 32.796,51.562 34.246,50.112 36.278,50.112 U3.A20@36.628,49.762
PD8: R85.1 U3.G14 | length 9.4
  Top_1 w0.1: v1(40.213,45.533) 40.838,46.158 40.838,49.198
  Top_1 w0.125: R85.1@40.386,53.84 40.386,50.868 40.12,50.602 40.12,49.915 40.838,49.198
  Bottom_6 w0.1: v1(40.213,45.533) 40.213,45.54 40.528,45.855 U3.G14@40.528,45.862
PD9: R86.1 U3.F14 | length 8.6
  Top_1 w0.1: v1(40.203,46.187) 40.585,46.569 40.585,48.969
  Top_1 w0.125: R86.1@39.751,53.848 39.751,51.875 39.854,51.772 39.854,49.7 40.585,48.969
  Bottom_6 w0.1: v1(40.203,46.187) U3.F14@40.528,46.512
PD10: R87.1 U3.G16 | length 7.6
  Bottom_6 w0.125: R87.1@31.758,45.466 34.906,45.466 35.012,45.572 35.128,45.572 38.938,45.572 U3.G16@39.228,45.862
PD11: R89.1 U3.H11 | length 10
  Bottom_6 w0.125: R89.1@40.386,53.84 40.388,53.84 40.474,53.753 40.474,53.735 42.981,51.229 42.981,50.612 42.981,49.221 43.135,49.067 43.135,46.397 42.832,46.094 42.832,45.566 U3.H11@42.478,45.212
PD12: R91.1 U3.D18 | length 6.6
  Top_1 w0.125: R91.1@31.758,49.022 31.765,49.029 33.614,49.029 34.301,48.341 v1(34.311,48.341)
  Bottom_6 w0.125: v1@34.387,48.333 35.36,48.333 35.579,48.114 37.626,48.114 U3.D18@37.928,47.812
PD13: R93.1 U3.J11 | length 13.1
  Top_1 w0.125: R93.1@31.758,48.387 31.758,48.385 31.967,48.176 33.375,48.176 34.991,46.56 36.951,46.56 38.198,45.313 39.237,45.313 39.648,44.902 39.648,44.325 39.936,44.036 41.201,44.036 41.402,44.237 v1(42.153,44.237)
  Bottom_6 w0.1: v1(42.153,44.237) U3.J11@42.478,44.562
PD16: R95.1 U3.E18 | length 6.5
  Bottom_6 w0.125: R95.1@31.758,48.006 32.209,48.006 32.7,47.515 35.328,47.515 37.575,47.515 U3.E18@37.928,47.162
PD17: R97.1 U3.H13 | length 10.6
  Bottom_6 w0.125: R97.1@39.751,53.84 39.827,53.764 39.876,53.764 42.094,51.546 42.094,49.346 42.838,48.602 42.838,47.524 41.508,46.194 41.508,45.853 41.506,45.851 41.506,45.54 U3.H13@41.178,45.212
PD18: R98.1 U3.H16 | length 8.9
  Top_1 w0.125: R98.1@31.758,47.117 33.006,47.117 35.611,44.512 37.053,44.512 v1(37.074,44.533)
  Bottom_6 w0.1: v1(37.074,44.533) 37.074,44.578 37.426,44.93 38.946,44.93 U3.H16@39.228,45.212
PD19: R99.1 U3.F18 | length 8.4
  Top_1 w0.127: R99.1@35.306,53.84 35.306,52.197 37.603,49.9 v1(37.603,46.837) v1@37.596,46.837
  Bottom_6 w0.1: v1(37.603,46.837) U3.F18@37.928,46.512
PD20: R100.1 U3.J12 | length 9.5
  Top_1 w0.125: R100.1@42.037,53.84 42.037,45.922 42.153,45.806 v1(42.153,44.887)
  Bottom_6 w0.1: U3.J12@41.828,44.562 v1(42.153,44.887)
PE4: R121.1 U3.AA13 | length 4.7
  Bottom_6 w0.125: R121.1@39.878,32.647 39.878,33.541 40.572,34.235 40.572,35.072 41.166,35.666 41.166,35.912 41.166,36.749 U3.AA13@41.178,36.762
PE9: R123.1 U3.Y16 | length 5.3
  Bottom_6 w0.125: R123.1@38.608,32.647 38.608,33.307 39.553,34.252 39.553,35.912 39.553,37.087 U3.Y16@39.228,37.412
PIOBU0: R125.1 U3.J10 | length 9.9
  Top_1 w0.125: R125.1@42.672,53.84 42.672,52.197 43.275,51.594 43.275,49.437 42.909,49.071 42.909,45.067 42.803,44.961 v1(42.803,44.887)
  Bottom_6 w0.1: v1(42.803,44.887) U3.J10@43.128,44.562
PIOBU1: R126.1 U3.A5 | length 4.9
  Bottom_6 w0.125: U3.A5@46.378,49.762 46.378,51.541 48.387,53.55 R126.1@48.387,53.84
QSPI0_CAL: R23.2 U3.M13 | length 0.8
  Top_1 w0.15: R23.2@40.465,42.937 40.48,42.923 40.843,42.923 v1(40.853,42.912)
  Bottom_6 w0.15: v1(40.853,42.912) 40.878,42.912 U3.M13@41.178,42.612
RS422_DE: R61.2 R196.2 U20.3 | length 44
  Top_1 w0.125: v1(41.783,28.956) R61.2@41.783,32.114
  Top_1 w0.15: v1(57.229,48.971) 57.277,49.056 57.542,49.53 57.713,49.639 57.725,49.647 59.46,49.647 U20.3@59.506,49.601
  SIGNAL_3 w0.15: v1(41.783,28.956) 38.227,28.956 36.983,30.2 36.983,32.118 38.321,33.456 46.283,33.456 47.117,34.29 48.895,34.29 57.229,42.624 v1(57.229,48.971)
RS422_R\E\: R59.2 R192.1 U20.2 | length 37.7
  Top_1 w0.125: R59.2@37.338,32.123 37.338,31.738 37.524,31.552 v1(37.524,31.129)
  Top_1 w0.15: v1(57.277,51.308) 57.542,50.744 R192.1@57.679,50.581 58.3,50.581 58.614,50.267 59.411,50.267 59.436,50.292 59.477,50.251 U20.2@59.506,50.251
  SIGNAL_3 w0.125: v1(37.524,31.129) 37.524,31.132 39.36,32.969 46.787,32.969 47.6,33.782 48.895,33.782 57.664,42.551 57.664,50.921 v1(57.277,51.308)
RS_422_2_PC104_RX_N: R177.1 R218.1 R224.1 | length 123.6
  Top_1 w0.134: v1(15.533,27.912) 15.461,27.912 15.354,28.019 14.811,28.019 14.222,28.608 14.222,29.676 21.209,36.663 21.209,50.568 16.65,55.127 16.65,56.642 17.237,57.229 17.237,58.521 16.435,59.323 16.435,59.594 16.302,59.727 v1(16.302,59.799) ; v1(74.422,78.101) 74.613,77.991 ccw(c74.68,78.107) 74.682,77.972 ; 74.683,77.973 75.044,77.981 cw(c75.054,77.586) 75.052,77.982 cw(c75.054,77.72) 75.054,77.982 ccw(c75.054,78.116) 75.178,78.065 75.232,78.197 R177.1@75.369,78.359
  SIGNAL_3 w0.1: v1(16.302,59.799) 16.302,59.861 16.449,60.007 16.449,60.538 13.781,63.206 13.781,73.091 23.116,82.426 52.534,82.426 53.995,80.965 70.643,80.965 73.542,78.066 73.637,77.971 73.649,77.959 74.213,77.959 74.356,78.101 v1(74.422,78.101)
  Bottom_6 w0.134: R218.1@14.801,27.686 14.801,27.749 15.009,27.957 15.009,27.985 15.088,28.063 15.303,28.063 v1(15.533,27.912) ; R224.1@14.801,59.309 14.949,59.161 14.949,58.947 15.028,58.868 15.908,58.868 16.439,59.399 16.439,59.608
RS_422_2_PC104_RX_P: R182.1 R219.1 R225.2 | length 123.3
  Top_1 w0.134: v1(15.533,28.437) 15.461,28.437 15.324,28.299 14.9,28.299 14.483,28.716 14.483,29.568 21.47,36.555 21.47,50.676 17.081,55.065 16.99,55.157 16.911,55.235 16.911,56.534 17.498,57.121 17.498,58.629 16.696,59.431 16.696,59.604 16.848,59.756 16.878,59.756 v1(16.827,59.807) ; v1(74.429,77.576) 74.617,77.691 cw(c74.687,77.577) 74.685,77.711 ; 74.688,77.711 ccw(c74.68,78.107) 74.69,77.711 75.05,77.72 cw(c75.054,77.586) 75.054,77.72 cw(c75.054,77.586) 75.178,77.637 75.232,77.505 R182.1@75.369,77.343
  SIGNAL_3 w0.1: v1(16.827,59.807) 16.827,59.869 16.689,60.007 16.689,60.638 14.021,63.306 14.021,72.991 23.215,82.186 52.434,82.186 53.895,80.725 70.543,80.725 73.55,77.719 74.22,77.719 74.363,77.576 v1(74.429,77.576)
  Bottom_6 w0.134: R219.1@14.801,28.702 14.801,28.639 15.009,28.431 15.009,28.403 15.088,28.325 15.303,28.325 v1(15.533,28.437) ; R225.2@14.801,58.166 14.949,58.314 14.949,58.528 15.028,58.607 16.016,58.607 16.7,59.291 16.7,59.608
RS_422_2_PC104_TX_N: R176.1 R217.1 | length 117.8
  Top_1 w0.134: v1(74.429,79.735) 74.617,79.85 cw(c74.687,79.736) 74.685,79.87 ccw(c74.68,80.266) 74.687,79.87 ; 74.688,79.87 ccw(c74.68,80.266) 74.69,79.87 75.05,79.879 cw(c75.054,79.745) 75.053,79.879 cw(c75.054,79.745) 75.178,79.796 75.232,79.664 R176.1@75.369,79.502
  SIGNAL_3 w0.1: v1(15.511,26.263) 15.445,26.263 15.303,26.12 14.099,26.12 13.695,26.524 13.695,33.422 12.888,34.229 12.888,51.262 13.556,51.93 13.556,73.448 22.916,82.808 52.767,82.808 54.147,81.427 70.814,81.427 72.378,79.863 74.22,79.863 74.349,79.735 v1(74.429,79.735)
  Bottom_6 w0.134: R217.1@14.801,26.565 14.956,26.41 14.956,26.21 15.035,26.131 15.307,26.131 15.439,26.263 v1(15.511,26.263)
RS_422_2_PC104_TX_P: R120.1 R216.1 | length 118.7
  Top_1 w0.134: v1(74.422,80.26) 74.613,80.149 ccw(c74.68,80.266) 74.682,80.131 ccw(c74.68,80.266) 74.683,80.132 75.044,80.14 cw(c75.054,79.745) 75.052,80.141 cw(c75.054,79.879) 75.054,80.141 ccw(c75.054,80.275) 75.178,80.224 75.232,80.356 R120.1@75.369,80.518
  SIGNAL_3 w0.1: v1(15.511,25.738) 15.445,25.738 15.303,25.88 13.999,25.88 13.455,26.424 13.455,33.322 12.648,34.13 12.648,51.362 13.316,52.03 13.316,73.547 22.816,83.048 52.866,83.048 54.247,81.667 70.913,81.667 72.477,80.103 74.2,80.103 74.357,80.26 v1(74.422,80.26)
  Bottom_6 w0.134: R216.1@14.801,25.4 14.938,25.537 14.938,25.773 15.035,25.87 15.307,25.87 15.422,25.755 15.422,25.733 v1@15.494,25.733
RS_422_RX_N: R77.1 R177.2 R194.2 SB4.1 U20.10 | length 54.1
  Top_1 w0.134: U20.10@63.938,49.601 64.389,49.601 64.584,49.796 64.881,49.796 65.335,50.25 65.469,50.25 R194.2@65.78,49.938 ; R194.2@65.78,49.93 R194.2@65.78,49.938 ; R177.2@76.269,78.359 76.269,78.296 76.477,78.088 76.477,78.06 76.556,77.982 76.962,77.982 77.094,78.113 v1(77.166,78.113) ; R77.1@82.179,67.472 82.015,67.637 82.015,67.768 81.91,67.872 81.787,67.872 81.655,67.74 v1(81.583,67.74) 81.511,67.74 81.379,67.872 81.223,67.872 81.201,67.85 80.878,67.526 80.878,62.112 80.878,56.526 80.718,56.366 80.718,56.179 v1(80.667,56.128) 80.616,56.077 80.429,56.077 79.892,55.539 68.43,55.539 67.157,54.267 67.157,50.889 66.518,50.25 66.092,50.25 R194.2@65.78,49.938
  SIGNAL_3 w0.1: v1(77.166,78.113) 77.232,78.113 77.375,77.971 79.089,77.971 79.959,77.101 79.959,74.304 82.663,71.6 82.663,70.703 82.663,68.255 82.298,67.89 81.792,67.89 81.641,67.74 v1(81.583,67.74)
  Bottom_6 w0.134: v1(80.667,56.128) 80.718,56.179 80.718,56.365 80.894,56.542 83.062,56.542 83.14,56.463 SB4.1@83.14,55.72
RS_422_RX_P: R109.1 R182.2 R194.1 SB3.1 U20.11 | length 53.5
  Top_1 w0.134: U20.11@63.938,50.251 64.389,50.251 64.584,50.057 64.773,50.057 65.227,50.511 65.469,50.511 R194.1@65.78,50.822 ; R194.1@65.78,50.83 R194.1@65.78,50.822 ; R182.2@76.269,77.343 76.269,77.406 76.477,77.614 76.477,77.642 76.556,77.72 76.962,77.72 77.094,77.588 v1(77.166,77.588) ; R109.1@82.179,68.488 82.015,68.324 82.015,68.172 81.975,68.133 81.768,68.133 81.637,68.265 v1(81.583,68.265) 81.511,68.265 81.379,68.133 81.115,68.133 81.093,68.111 80.617,67.634 80.617,62.003 80.617,56.634 80.532,56.55 80.347,56.55 v1(80.296,56.499) 80.245,56.448 80.245,56.262 79.784,55.801 68.321,55.801 66.896,54.375 66.896,50.997 66.41,50.511 66.092,50.511 R194.1@65.78,50.822
  SIGNAL_3 w0.1: v1(77.166,77.588) 77.232,77.588 77.375,77.731 78.99,77.731 79.719,77.002 79.719,74.205 82.423,71.501 82.423,68.354 82.199,68.13 81.792,68.13 81.657,68.265 v1(81.583,68.265)
  Bottom_6 w0.134: v1(80.296,56.499) 80.347,56.55 80.533,56.55 80.786,56.803 83.062,56.803 83.14,56.882 SB3.1@83.14,57.625
RS_422_TX_N: R75.1 R176.2 R195.1 SB4.2 U20.9 | length 63.7
  Top_1 w0.134: U20.9@63.938,48.951 64.389,48.951 64.584,48.756 64.881,48.756 65.286,48.352 65.469,48.352 R195.1@65.78,48.663 ; R195.1@65.78,48.671 R195.1@65.78,48.663 ; R176.2@76.269,79.502 76.269,79.565 76.477,79.773 76.477,79.801 76.556,79.879 76.716,79.879 77.012,79.879 77.144,79.747 v1(77.216,79.747) ; R75.1@82.179,66.456 82.179,66.393 81.971,66.185 81.971,66.158 81.892,66.079 81.673,66.079 81.426,65.832 81.426,64.641 v1(81.293,64.456) 81.293,64.384 81.425,64.252 81.425,56.328 80.637,55.54 80.45,55.54 v1(80.399,55.489) 80.348,55.438 80.348,55.251 80.212,55.115 68.634,55.115 67.601,54.082 67.601,49.467 66.486,48.352 66.092,48.352 R195.1@65.78,48.663
  SIGNAL_3 w0.1: v1@77.216,79.76 77.288,79.76 77.425,79.897 77.894,79.897 80.517,77.275 80.517,74.422 83.148,71.791 83.148,67.941 81.437,66.23 81.437,64.658 81.293,64.515 v1(81.293,64.456)
  Bottom_6 w0.134: v1(80.399,55.489) 80.45,55.54 80.637,55.54 80.903,55.806 81.711,55.806 82.613,54.904 85.293,54.904 85.506,55.117 85.506,56.35 85.304,56.553 84.756,56.553 84.677,56.474 SB4.2@84.677,55.72
RS_422_TX_P: R53.1 R120.2 R195.2 SB3.2 U20.8 | length 64.8
  Top_1 w0.134: U20.8@63.938,48.301 64.389,48.301 64.584,48.495 64.773,48.495 65.177,48.091 65.469,48.091 R195.2@65.78,47.779 ; R195.2@65.78,47.771 R195.2@65.78,47.779 ; R120.2@76.269,80.518 76.269,80.455 76.477,80.247 76.477,80.219 76.556,80.141 76.824,80.141 77.012,80.141 77.144,80.272 v1(77.216,80.272) ; R53.1@82.179,65.44 82.179,65.504 81.971,65.712 81.971,65.739 81.892,65.818 81.781,65.818 81.687,65.724 81.687,64.641 v1(81.818,64.45) 81.818,64.378 81.686,64.246 81.686,56.22 80.821,55.355 80.821,55.169 v1(80.771,55.118) 80.72,55.067 80.533,55.067 80.32,54.854 68.742,54.854 67.862,53.973 67.862,49.358 66.594,48.091 66.092,48.091 R195.2@65.78,47.779
  SIGNAL_3 w0.1: v1@77.216,80.26 77.301,80.26 77.425,80.137 77.994,80.137 80.757,77.374 80.757,74.522 83.388,71.891 83.388,67.841 81.677,66.131 81.677,64.658 81.818,64.517 v1(81.818,64.45)
  Bottom_6 w0.134: v1(80.771,55.118) 80.821,55.169 80.821,55.355 81.011,55.545 81.603,55.545 82.505,54.643 85.401,54.643 85.767,55.009 85.767,56.458 85.412,56.814 84.756,56.814 84.677,56.893 SB3.2@84.677,57.625
SCL_EXP_CONNECTOR: J15.5 J15.6 R241.2 | length 6.5
  Top_1 w0.2: v1@29.37,10.181 v1(29.376,10.187)
  SIGNAL_3 w0.2: v1(29.37,7.209) v1@29.37,10.181
  Bottom_6 w0.127: v1(29.376,10.187) 29.39,10.173 30.398,10.173 R241.2@30.411,10.16
  Bottom_6 w0.2: J15.6@28.615,8.217 29.365,8.217 ; v1(29.37,7.209) 29.365,7.215 29.365,8.217 ; J15.5@30.115,8.217 29.365,8.217
SDA_EXP_CONNECTOR: J15.1 J15.2 R238.2 | length 4.3
  Bottom_6 w0.127: R238.2@34.359,10.16 35.023,10.16 35.36,9.823 35.36,8.24 35.337,8.217 ; J15.2@34.615,8.217 35.337,8.217 ; J15.1@36.115,8.217 35.337,8.217
SDMMC0_CAL: R24.2 U3.R16 | length 1.5
  Top_1 w0.1: R24.2@40.203,39.974 v1(40.203,40.337)
  Bottom_6 w0.1: U3.R16@39.228,40.662 39.553,40.337 v1(40.203,40.337)
SDMMC0_CLK: R31.2 R140.2 U5.P6@35.4,21.273 | length 17.1
  Top_1 w0.125: R140.2@35.425,21.273 35.425,21.233 36.175,20.483 v1(36.175,20.479) 37.403,20.479 37.862,20.939 37.862,22.082 v1(37.338,22.606)
  Bottom_6 w0.125: U5.P6@35.4,21.273 35.4,21.264 36.175,20.488 v1(36.175,20.479) v1@36.175,20.456 ; R31.2@36.703,32.123 36.703,29.665 36.703,29.394 38.403,27.694 38.878,27.219 38.878,25.657 38.878,24.587 37.415,23.124 37.338,23.047 v1(37.338,22.606)
SDMMC0_CMD: R32.2 R141.2 U5.P5@35.4,22.273 | length 14.7
  Top_1 w0.125: v1@34.963,22.723 34.963,22.717 R141.2@35.406,22.273 ; R141.2@35.413,22.298 36.229,23.114 38.003,23.114 v1(38.005,23.112)
  Bottom_6 w0.125: v1(34.9,22.773) U5.P5@35.4,22.273 ; R32.2@37.338,32.123 37.338,31.688 37.131,31.481 37.131,30.814 37.412,30.533 37.412,29.213 39.163,27.463 39.163,24.27 v1(38.005,23.112)
SDMMC0_D0: R35.2 R132.2 U5.K2@31.4,25.273 | length 13.3
  Top_1 w0.125: v1(30.998,25.918) 29.845,27.071 29.845,28.24 30.501,28.896 31.369,28.896 35.675,28.896 36.086,28.896 v1(36.111,28.921)
  Bottom_6 w0.125: v1(30.998,25.918) U5.K2@31.4,25.273 ; R35.2@36.068,32.123 36.09,32.101 36.09,28.943 v1(36.111,28.921)
SDMMC0_D1: R37.2 R133.2 U5.N2@34.4,25.273 | length 13.6
  Top_1 w0.125: R133.2@34.444,25.257 34.444,25.319 33.998,25.766 v1(33.96,25.766) 33.96,25.832 34.379,26.251 36.491,26.251 v1(37.594,25.148)
  Bottom_6 w0.125: v1(33.96,25.766) 33.96,25.74 34.4,25.299 U5.N2@34.4,25.273 ; R37.2@35.433,32.123 35.433,28.719 35.433,27.424 36.303,26.554 37.503,25.355 37.503,25.315 37.594,25.223 v1(37.594,25.148)
SDMMC0_D2: R46.2 R134.2 U5.K3@31.4,24.273 | length 15.3
  Top_1 w0.125: R134.2@31.426,24.273 31.563,24.111 v1(31.9,23.773) 32.345,24.218 32.345,26.154 32.345,26.7 33.204,27.559 33.227,27.582 37.5,27.582 37.944,28.026 37.944,29.234 37.944,29.442 38.685,30.183 v1@39.236,30.734
  Bottom_6 w0.125: U5.K3@31.4,24.273 v1(31.9,23.773) ; v1(39.243,30.734) R46.2@39.243,32.123
SDMMC0_D3: R48.2 R135.2 U5.N3@34.4,24.273 | length 15.1
  Top_1 w0.125: v1(33.96,23.82) 34.375,24.086 R135.2@34.513,24.248 34.513,24.223 35.18,23.555 37.787,23.555 37.818,23.587 40.005,25.773 40.005,26.108 40.005,27.684 v1(40.007,27.686)
  Bottom_6 w0.125: v1(33.96,23.82) 33.96,23.826 34.4,24.267 U5.N3@34.4,24.273 ; v1(40.007,27.686) 40.005,27.688 40.005,28.829 41.783,30.607 R48.2@41.783,32.123
SDMMC0_D4: R38.2 R136.2 U5.N8@34.4,19.273 | length 20.6
  Top_1 w0.125: R136.2@32.943,18.773 32.955,18.784 33.913,18.784 v1(33.924,18.796) 33.977,18.733 34.902,17.642 35.433,17.642 36.899,19.108 38.269,20.478 38.269,22.465 v1(39.56,23.756)
  Bottom_6 w0.125: v1(33.924,18.796) U5.N8@34.4,19.272 ; R38.2@37.973,32.123 37.973,31.509 37.968,31.505 37.968,29.176 39.56,27.584 v1(39.56,23.756)
SDMMC0_D5: R39.2 R137.2 U5.K8@31.4,19.273 | length 20.4
  Top_1 w0.125: v1(30.861,19.773) 30.469,20.165 R137.2@30.469,20.773 30.469,20.798 31.38,21.709 31.38,22.946 31.562,23.128 32.611,23.128 33.053,23.57 33.053,26.182 33.78,26.909 37.93,26.909 39.639,28.618 ccw(c39.55,28.706) 39.675,28.706 39.675,30.97 39.415,31.231 39.415,31.672 39.866,32.123 R39.2@39.878,32.123
  Bottom_6 w0.125: v1(30.861,19.773) 30.881,19.773 31.381,19.273 U5.K8@31.4,19.273
SDMMC0_D6: R41.2 R138.2 U5.N9@34.4,18.273 | length 19.4
  Top_1 w0.125: v1(33.924,17.773) 34.288,17.506 34.576,17.294 34.729,17.18 R138.2@34.867,17.018
  Bottom_6 w0.125: U5.N9@34.4,18.273 34.4,18.261 33.924,17.785 v1(33.924,17.773) 36.188,17.773 36.588,18.173 36.588,25.746 34.798,27.537 R41.2@34.798,32.123
SDMMC0_D7: R44.2 R139.2 U5.K9@31.4,18.273 | length 27.7
  Top_1 w0.125: v1(30.861,17.773) 30.851,17.763 30.851,17.086 R139.2@30.919,17.018 ; R139.2@30.919,17.018 30.919,15.875 31.427,15.367 37.383,15.367 40.829,18.814 40.96,30.097 40.96,30.149 40.925,30.185 v1(40.513,30.607)
  Bottom_6 w0.125: v1(30.861,17.773) 30.88,17.773 31.38,18.273 U5.K9@31.4,18.273 ; v1(40.513,30.607) R44.2@40.513,32.123
SDMMC0_DS: R50.2 U5.K5@31.4,22.273 | length 19.8
  Top_1 w0.125: v1(30.881,21.761) 30.561,22.081 30.481,22.161 30.481,23.323 30.516,23.358 30.78,23.622 31.432,23.622 31.676,23.378 32.247,23.378 32.695,23.826 32.695,26.41 33.474,27.189 37.603,27.189 38.623,28.209 39.243,28.829 39.243,29.026 v1(39.243,29.464)
  Bottom_6 w0.125: v1(30.881,21.761) 30.884,21.761 31.396,22.273 U5.K5@31.4,22.273 ; v1(39.243,29.464) 40.09,29.464 41.148,30.522 R50.2@41.148,32.123
SDMMC0_NRST: R34.2 R142.2 U5.M5@33.4,22.273 | length 16.7
  Top_1 w0.125: R142.2@32.807,21.77 32.913,21.877 v1(32.913,22.708) ; v1@32.913,22.719 33.572,23.378 33.572,26.156 34.061,26.645 36.915,26.645 37.986,26.645 38.418,26.645 39.95,28.178 40.031,28.258 40.031,30.863 cw(c40.156,30.863) 40.067,30.95 40.067,30.957 40.439,31.329 40.513,31.404 R34.2@40.513,32.123
  Bottom_6 w0.125: v1(32.913,22.708) 32.939,22.708 33.374,22.273 U5.M5@33.4,22.273
SDMMC1_CAL: R25.2 U3.B13 | length 6.4
  Bottom_6 w0.125: R25.2@38.505,53.84 38.517,53.84 39.092,53.265 39.46,53.265 39.668,53.264 41.503,51.43 41.503,49.437 U3.B13@41.178,49.112
SDMMC1_CLK: R64.2 R147.2 U6.P6@33.368,65.564 | length 21.5
  Top_1 w0.125: R147.2@33.393,65.564 33.393,65.524 34.143,64.774 v1(34.143,64.77) 35.113,63.8 35.113,63.447 35.113,63.385 35.208,63.29 35.397,63.29 35.492,63.195 35.492,60.144 35.397,60.05 35.208,60.05 35.113,60.144 35.113,62.816 35.018,62.911 34.829,62.911 34.734,62.816 34.734,59.765 34.829,59.671 35.018,59.671 35.113,59.576 35.113,59.513 35.113,58.613 35.687,58.039 v1(37.084,58.039)
  Bottom_6 w0.125: U6.P6@33.368,65.564 33.368,65.555 34.143,64.779 v1(34.143,64.77) ; v1(37.084,58.039) 37.084,58.037 37.293,57.828 R64.2@37.293,54.364
SDMMC1_CMD: R62.2 R148.2 U6.P5@33.368,66.564 | length 22.3
  Top_1 w0.125: R148.2@33.381,66.564 33.547,66.73 33.547,66.88 v1(33.872,67.205) 35.538,67.205 35.99,66.753 36.034,66.709 36.168,66.575 36.322,66.421 36.322,64.004 36.227,63.909 36.038,63.909 35.943,64.004 35.943,66.012 35.848,66.107 35.659,66.107 35.564,66.012 35.564,63.625 35.659,63.53 36.227,63.53 36.322,63.436 36.322,63.373 v1(36.322,58.674)
  Bottom_6 w0.125: U6.P5@33.368,66.564 33.368,66.632 33.872,67.136 v1(33.872,67.205) ; v1(36.322,58.674) 36.322,57.831 36.703,57.45 R62.2@36.703,54.364
SDMMC1_D0: R66.2 R143.2 U6.K2@29.368,69.564 | length 21
  Top_1 w0.125: v1(28.966,70.209) 29.256,69.726 R143.2@29.343,69.564 ; R143.2@29.394,69.564 30.258,69.564 30.873,68.949 30.873,68.022 31.33,67.565 32.261,67.565 32.56,67.267 32.56,61.852 32.56,61.79 32.655,61.695 32.947,61.695 33.042,61.6 33.042,61.411 32.947,61.316 32.655,61.316 32.56,61.221 32.56,60.616 32.56,59.769 v1(33.655,58.674)
  Bottom_6 w0.125: v1(28.966,70.209) U6.K2@29.368,69.564 ; v1(33.655,58.674) 34.151,58.178 34.151,56.81 35.474,55.488 R66.2@35.474,54.368
SDMMC1_D1: R68.2 R144.2 U6.N2@32.368,69.564 | length 23.4
  Top_1 w0.125: v1(31.928,70.057) 31.966,70.057 32.412,69.61 R144.2@32.412,69.548 ; R144.2@32.487,69.548 32.487,69.573 33.526,70.612 36.195,70.612 38.862,67.945 38.862,58.2 v1(37.851,57.189)
  Bottom_6 w0.125: v1(31.928,70.057) 31.928,70.031 32.368,69.59 U6.N2@32.368,69.564 ; v1(37.851,57.189) 37.872,57.168 37.872,54.386 R68.2@37.893,54.364
SDMMC1_D2: R70.2 R145.2 U6.K3@29.368,68.564 | length 23.2
  Top_1 w0.125: R145.2@29.394,68.564 29.865,68.092 28.638,66.865 28.638,65.211 31.016,62.833 31.06,62.788 31.194,62.788 31.328,62.922 31.462,62.922 31.748,62.636 31.748,61.777 31.653,61.682 31.464,61.682 31.369,61.777 31.369,62.228 31.274,62.322 31.085,62.322 30.99,62.228 30.99,61.398 31.085,61.303 31.274,61.303 31.369,61.208 31.369,61.146 31.369,58.576 31.906,58.039 v1(34.925,58.039) ; v1@29.853,68.08 v1(29.868,68.064)
  Bottom_6 w0.125: U6.K3@29.368,68.564 v1(29.868,68.064) ; v1(34.925,58.039) 34.925,56.726 36.093,55.559 R70.2@36.093,54.363
SDMMC1_D3: R71.2 R146.2 U6.N3@32.368,68.564 | length 21.6
  Top_1 w0.125: v1@31.918,68.102 32.381,68.564 R146.2@32.406,68.564 ; R146.2@32.481,68.539 32.481,68.514 33.23,67.765 36.827,67.765 38.354,66.238 38.354,62.183 38.354,60.702 38.259,60.607 37.734,60.607 37.64,60.513 37.64,60.323 37.734,60.228 38.259,60.228 38.354,60.134 38.354,60.071 38.354,58.262 v1(38.355,58.26)
  Bottom_6 w0.125: v1(31.868,68.064) U6.N3@32.368,68.564 ; v1(38.355,58.26) 38.345,58.25 38.345,55.771 39.116,55 R71.2@39.116,54.373
SDMMC1_NRST: R60.2 R149.2 U6.M5@31.368,66.564 | length 17.4
  Top_1 w0.125: R149.2@31.342,66.518 31.358,66.518 31.595,66.281 31.603,66.281 v1(31.831,66.052) 32.253,65.631 32.253,58.703 v1(32.269,58.687)
  Bottom_6 w0.125: U6.M5@31.368,66.564 31.368,66.54 31.831,66.076 v1(31.831,66.052) ; v1(32.269,58.687) 32.269,57.968 32.281,57.955 32.326,57.911 32.393,57.844 32.46,57.777 32.93,57.307 33.064,57.307 33.198,57.441 33.198,57.575 32.661,58.112 32.661,58.246 32.795,58.38 32.929,58.38 33.734,57.575 33.734,57.441 33.332,57.039 33.332,56.905 33.376,56.861 34.798,55.439 R60.2@34.798,54.364
SDMMC2_CAL: R26.2 U3.E14 | length 3
  Top_1 w0.1: R26.2@41.178,49.175 41.205,49.147 41.205,48.743 v1(41.255,48.693)
  Bottom_6 w0.1: U3.E14@40.528,47.162 40.771,47.405 41.313,47.405 41.623,47.715 41.623,48.325 v1(41.255,48.693)
SDMMC2_CD: J2.P9 R79.2 R156.1 | length 54.3
  Top_1 w0.125: J2.P9@25.297,77.546 25.28,77.529 v1(24.55,77.529) 24.55,78.998 29.2,83.647 40.569,83.647 44.948,79.268 44.948,72.66 41.539,69.251 41.539,57.18 41.082,56.724 41.082,54.426 R79.2@41.021,54.364
  Bottom_6 w0.125: v1(24.55,77.529) 25.746,77.645 R156.1@25.908,77.782